# EAGLE board CT_schematic (EAGLE 7.6.0)

Size 100 x 80 mm. Coordinates in mm from the lower left corner, seen from the top.
Outline: 0,0 100,0 100,80 0,80 0,0
Copper layers (1*16): Top 0.035mm / dielectric 1.5mm / Bottom 0.035mm
Design rules "default": minimum track width 10mil, minimum drill 24mil, track to track 8mil, track to pad 8mil, pad to pad 8mil, via to via 8mil, smd to smd 8mil, copper to edge 40mil, drill to drill 8mil, minimum pad ring 10mil, minimum via ring 8mil, stop-mask expansion 4mil, vias tented up to drill 0mil, thermal gap 10mil

## Footprints (pad centres in the part's own frame; a part is rotated, then mirrored left to right if it is on the bottom)
C0603 = smd 0.8 x 0.8: 1 -0.762,0; 2 0.762,0
C0402 = smd 0.5 x 0.5: 1 -0.508,0; 2 0.508,0
C0805 = smd 1.2 x 1.3: 1 -1.016,0; 2 1.016,0
C1206 = smd 1.3 x 1.6: 1 -1.524,0; 2 1.524,0
C1210 = smd 1.2 x 2.5: 1 -1.524,0; 2 1.524,0
EXV-9H = smd 3.505 x 1.676: 1 -2.857,0; 2 2.857,0
L0603 = smd 0.8 x 0.8: 1 -0.762,0; 2 0.762,0
L1210 = smd 1.2 x 2.5: 1 -1.524,0; 2 1.524,0
PJ-037B_PACKAGE = drill 3.7 square: 1 12,0 | drill 3.2 square: 2 6,0
R0603 = smd 0.8 x 0.8: 1 -0.762,0; 2 0.762,0
LQFP64 = smd 0.3 x 1.2: 1 -3.75,-5.75; 2 -3.25,-5.75; 3 -2.75,-5.75; 4 -2.25,-5.75; 5 -1.75,-5.75; 6 -1.25,-5.75; 7 -0.75,-5.75; 8 -0.25,-5.75; 9 0.25,-5.75; 10 0.75,-5.75; 11 1.25,-5.75; 12 1.75,-5.75; 13 2.25,-5.75; 14 2.75,-5.75; 15 3.25,-5.75; 16 3.75,-5.75; 33 3.75,5.75; 34 3.25,5.75; 35 2.75,5.75; 36 2.25,5.75; 37 1.75,5.75; 38 1.25,5.75; 39 0.75,5.75; 40 0.25,5.75; 41 -0.25,5.75; 42 -0.75,5.75; 43 -1.25,5.75; 44 -1.75,5.75; 45 -2.25,5.75; 46 -2.75,5.75; 47 -3.25,5.75; 48 -3.75,5.75 | smd 1.2 x 0.3: 17 5.75,-3.75; 18 5.75,-3.25; 19 5.75,-2.75; 20 5.75,-2.25; 21 5.75,-1.75; 22 5.75,-1.25; 23 5.75,-0.75; 24 5.75,-0.25; 25 5.75,0.25; 26 5.75,0.75; 27 5.75,1.25; 28 5.75,1.75; 29 5.75,2.25; 30 5.75,2.75; 31 5.75,3.25; 32 5.75,3.75; 49 -5.75,3.75; 50 -5.75,3.25; 51 -5.75,2.75; 52 -5.75,2.25; 53 -5.75,1.75; 54 -5.75,1.25; 55 -5.75,0.75; 56 -5.75,0.25; 57 -5.75,-0.25; 58 -5.75,-0.75; 59 -5.75,-1.25; 60 -5.75,-1.75; 61 -5.75,-2.25; 62 -5.75,-2.75; 63 -5.75,-3.25; 64 -5.75,-3.75
AT24C02D = smd 1.6 x 0.6: 1 -2.475,1.905 | smd 1.55 x 0.6: 2 -2.475,0.635; 3 -2.475,-0.635; 4 -2.475,-1.905; 5 2.475,-1.905; 6 2.475,-0.635; 7 2.475,0.635; 8 2.475,1.905
SSOP-20 = smd 1.651 x 0.432: 1 -3.48,2.925; 2 -3.48,2.275; 3 -3.48,1.625; 4 -3.48,0.975; 5 -3.48,0.325; 6 -3.48,-0.325; 7 -3.48,-0.975; 8 -3.48,-1.625; 9 -3.48,-2.275; 10 -3.48,-2.925; 11 3.48,-2.925; 12 3.48,-2.275; 13 3.48,-1.625; 14 3.48,-0.975; 15 3.48,-0.325; 16 3.48,0.325; 17 3.48,0.975; 18 3.48,1.625; 19 3.48,2.275; 20 3.48,2.925
182-009-MALE = drill 1.194 pad 1.524 octagon: 1 -5.537,10.923; 2 -2.769,10.923; 3 0,10.923; 4 2.769,10.923; 5 5.537,10.923; 6 -4.153,8.08; 7 -1.384,8.08; 8 1.384,8.08; 9 4.153,8.08 | hole 3.048: -12.446,9.501; 12.446,9.501
ASEK = smd 1.4 x 1: 1 -1.1,-0.8; 2 1.1,-0.8; 3 1.1,0.8; 4 -1.1,0.8
ASFL1 = smd 1.7 x 1.5: 1 -1.27,-1.1; 2 1.27,-1.1; 3 1.27,1.1; 4 -1.27,1.1
WSON-8 = smd 0.3 x 0.6: 1 -0.75,0; 2 0.05,0; 3 0.85,0; 4 1.65,0; 5 1.65,3.8; 6 0.85,3.8; 7 0.05,3.8; 8 -0.75,3.8 | smd 3 x 2.6: PAD 0.45,1.9
SON-6 = smd 0.55 x 0.3: 1 -0.355,0.5 | smd 0.52 x 0.3: 2 -0.37,0; 3 -0.37,-0.5; 4 0.37,-0.5; 5 0.37,0; 6 0.37,0.5
SW_4-1437565-2 = smd 1.4 x 2.1: 1 -2.23,4.55; 2 -2.23,-4.55; 3 2.23,4.55; 4 2.23,-4.55
LGM67K-G1J2-24-Z = smd 0.8 x 1.4: A -2,0; C 0,0
NC7SZ125M5X = smd 1.3 x 0.7: 1 -1.3,0.95; 2 -1.3,0; 3 -1.3,-0.95; 4 1.3,-0.95; 5 1.3,0.95
DUMMY_PACKAGE_124 = drill 0.3: 1 0,-1; 2 1.5,-1; 3 3,-1

## Placement (x,y rotation side)
C1  1e-06  [C0603]  -58.42,62.23 0 top  (outside the outline)
C2  1e-07  [C0603]  -62.23,62.23 0 top  (outside the outline)
C3  1e-07  [C0603]  -66.04,62.23 0 top  (outside the outline)
C4  1e-07  [C0603]  -69.85,62.23 0 top  (outside the outline)
C5  1e-07  [C0603]  -15.24,67.31 0 top  (outside the outline)
C6  1e-07  [C0603]  -19.05,67.31 0 top  (outside the outline)
C7  4.7e-06  [C0603]  -54.61,62.23 0 top  (outside the outline)
C8  1e-08  [C0603]  -22.86,67.31 0 top  (outside the outline)
C9  1e-08  [C0603]  -26.67,67.31 0 top  (outside the outline)
C10  1e-06  [C0603]  -30.48,67.31 0 top  (outside the outline)
C11  1e-08  [C0402]  -19.05,72.39 0 top  (outside the outline)
C12  1e-06  [C0603]  -34.29,67.31 0 top  (outside the outline)
C13  1e-06  [C0603]  -38.1,67.31 0 top  (outside the outline)
C14  1e-06  [C0603]  -41.91,67.31 0 top  (outside the outline)
C15  4.7e-06  [C0805]  -40.64,55.88 0 top  (outside the outline)
C16  1e-08  [C0402]  -22.86,72.39 0 top  (outside the outline)
C17  1e-08  [C0402]  -26.67,72.39 0 top  (outside the outline)
C18  1e-08  [C0402]  -30.48,72.39 0 top  (outside the outline)
C19  1e-05  [C1206]  -29.21,55.88 0 top  (outside the outline)
C20  1e-05  [C1210]  -16.51,57.15 0 top  (outside the outline)
C21  1e-07  [C0402]  -34.29,72.39 0 top  (outside the outline)
C22  0.0001  [EXV-9H]  -38.1,49.53 0 top  (outside the outline)
C23  0.0001  [EXV-9H]  -49.53,49.53 0 top  (outside the outline)
C24  1e-08  [C0402]  -38.1,72.39 0 top  (outside the outline)
F1  240.0  [L0603]  -45.72,67.31 0 top  (outside the outline)
I1  1.5e-05  [L1210]  -22.86,57.15 0 top  (outside the outline)
J1  PJ-037B  [PJ-037B_PACKAGE]  -67.31,7.62 0 top  (outside the outline)
R2  1000.0  [R0603]  -49.53,67.31 0 top  (outside the outline)
R4  4700.0  [R0603]  -53.34,67.31 0 top  (outside the outline)
R5  2200.0  [R0603]  -57.15,67.31 0 top  (outside the outline)
R6  2200.0  [R0603]  -60.96,67.31 0 top  (outside the outline)
R7  10000.0  [R0603]  -20.32,62.23 0 top  (outside the outline)
R8  10000.0  [R0603]  -25.4,62.23 0 top  (outside the outline)
R9  10000.0  [R0603]  -30.48,62.23 0 top  (outside the outline)
R10  10000.0  [R0603]  -35.56,62.23 0 top  (outside the outline)
R11  10000.0  [R0603]  -40.64,62.23 0 top  (outside the outline)
R12  100000.0  [R0603]  -45.72,55.88 0 top  (outside the outline)
R13  100000.0  [R0603]  -50.8,55.88 0 top  (outside the outline)
R14  100000.0  [R0603]  -55.88,55.88 0 top  (outside the outline)
R15  100000.0  [R0603]  -60.96,55.88 0 top  (outside the outline)
R16  2231.0  [R0603]  -64.77,67.31 0 top  (outside the outline)
R17  1000.0  [R0603]  -68.58,67.31 0 top  (outside the outline)
R18  10000.0  [R0603]  -45.72,62.23 0 top  (outside the outline)
R19  10000.0  [R0603]  -50.8,62.23 0 top  (outside the outline)
R20  9100.0  [R0603]  -15.24,72.39 0 top  (outside the outline)
R21  680000.0  [R0603]  -66.04,55.88 0 top  (outside the outline)
R22  120000.0  [R0603]  -15.24,62.23 0 top  (outside the outline)
U1  stm32f100r8t6  [LQFP64]  -22.86,29.21 0 top  (outside the outline)
U2  AT24C02D-SSHM-T  [AT24C02D]  -60.96,27.94 0 top  (outside the outline)
U3  MAX3218EAP+T  [SSOP-20]  -17.78,40.64 0 top  (outside the outline)
U4  182-009-113R531  [182-009-MALE]  -36.83,6.35 0 top  (outside the outline)
U5  ASEK-32.768KHz-ECST  [ASEK]  -29.21,49.53 0 top  (outside the outline)
U6  ASFL1-25MHZ-NCS  [ASFL1]  -57.15,40.64 0 top  (outside the outline)
U7  LP3878SDX-ADJ/NOPB  [WSON-8]  -40.64,39.37 0 top  (outside the outline)
U8  TPS3895ADRYR  [SON-6]  -46.99,71.12 0 top  (outside the outline)
U9  4-1437565-2  [SW_4-1437565-2]  -44.45,27.94 0 top  (outside the outline)
U10  Q65110A2395  [LGM67K-G1J2-24-Z]  -59.69,49.53 0 top  (outside the outline)
U11  nc7sz125m5x  [NC7SZ125M5X]  -34.29,55.88 0 top  (outside the outline)
U12  Dummy  [DUMMY_PACKAGE_124]  -44.45,72.39 0 top  (outside the outline)

## Library data of the parts
C1-C24 F1 I1 J1 R2 R4-R22 U1-U12 = circuit_tree

## Nets
CLK_U1_3: U1.3 U5.3
CLK_U1_5: U1.5 U6.3
GND: C1.2 C2.2 C3.2 C4.2 C5.2 C6.2 C7.2 C8.2 C9.2 C10.2 C11.2 C12.2 C13.2 C14.2 C16.2 C17.2 C18.2 C19.2 C20.2 C21.2 C22.2 C23.2 C24.2 J1.2 R2.2 R7.2 R8.2 R10.2 R11.2 R17.2 R20.2 R22.2 U1.12 U1.18 U1.31 U1.47 U1.63 U2.4 U3.5 U3.17 U3.20 U4.5 U5.2 U6.2 U7.3 U7.PAD U8.2 U10.C U11.1 U11.3 U12.1
NET_U1_7: R4.1 U1.7 U11.4
NET_U1_13: C8.1 C9.1 C10.1 F1.1 U1.13
NET_U1_58: R5.1 U1.58 U2.6
NET_U1_59: R6.1 U1.59 U2.5
NET_U1_60: R7.1 U1.60
NET_U1_61: U10.A
NET_U1_62: U9.3 U9.4
NET_U2_1: R9.1 U2.1
NET_U2_2: R10.1 U2.2
NET_U2_3: R11.1 U2.3
NET_U2_7: R8.1 U2.7
NET_U3_1: I1.1 U3.1
NET_U3_2: R12.1 U3.2
NET_U3_3: R13.1 U3.3
NET_U3_4: R14.1 U3.4
NET_U3_15: C14.1 U3.15
NET_U3_16: C15.2 U3.16
NET_U3_18: C15.1 U3.18
NET_U3_19: C13.1 U3.19
NET_U4_2: U3.12 U4.2
NET_U4_3: U3.14 U4.3
NET_U4_7: U3.11 U4.7
NET_U4_8: U3.13 U4.8
NET_U7_1: C18.1 U7.1
NET_U7_6: R16.2 R17.1 U7.6
NET_U7_8: R15.1 U7.8
NET_U8_1: R19.1 R20.1 U8.1
NET_U8_3: R21.2 R22.1 U8.3
NET_U8_4: R18.1 U8.4 U11.2
NET_U9_1: R2.1 U9.1 U9.2
PROC_ADC1_IN3: U1.17 U12.3
PROC_ADC1_IN4: U1.20 U12.2
PROC_USART1_CTS: U1.44 U3.8
PROC_USART1_RTS: U1.45 U3.10
PROC_USART1_RX: U1.43 U3.9
PROC_USART1_TX: U1.42 U3.7
VCC_S1_10V1: C19.1 C22.1 C23.1 J1.1 R15.2 U7.4
VCC_TIER1_3V3: C1.1 C2.1 C3.1 C4.1 C5.1 C6.1 C7.1 C11.1 C12.1 C16.1 C17.1 C20.1 C21.1 C24.1 F1.2 I1.2 R4.2 R5.2 R6.2 R9.2 R12.2 R13.2 R14.2 R16.1 R18.2 R19.2 R21.1 U1.1 U1.19 U1.32 U1.48 U1.64 U2.8 U3.6 U5.4 U6.4 U7.5 U8.6 U11.5

## Tracks (layer width: path | path; a pad name or v marks a point on that pad's centre or on a via)
CLK_U1_3  (1 unrouted)
CLK_U1_5  (1 unrouted)
GND  (50 unrouted)
NET_U1_7  (2 unrouted)
NET_U1_13  (4 unrouted)
NET_U1_58  (2 unrouted)
NET_U1_59  (2 unrouted)
NET_U1_60  (1 unrouted)
NET_U1_62  (1 unrouted)
NET_U2_1  (1 unrouted)
NET_U2_2  (1 unrouted)
NET_U2_3  (1 unrouted)
NET_U2_7  (1 unrouted)
NET_U3_1  (1 unrouted)
NET_U3_2  (1 unrouted)
NET_U3_3  (1 unrouted)
NET_U3_4  (1 unrouted)
NET_U3_15  (1 unrouted)
NET_U3_16  (1 unrouted)
NET_U3_18  (1 unrouted)
NET_U3_19  (1 unrouted)
NET_U4_2  (1 unrouted)
NET_U4_3  (1 unrouted)
NET_U4_7  (1 unrouted)
NET_U4_8  (1 unrouted)
NET_U7_1  (1 unrouted)
NET_U7_6  (2 unrouted)
NET_U7_8  (1 unrouted)
NET_U8_1  (2 unrouted)
NET_U8_3  (2 unrouted)
NET_U8_4  (2 unrouted)
NET_U9_1  (2 unrouted)
PROC_ADC1_IN3  (1 unrouted)
PROC_ADC1_IN4  (1 unrouted)
PROC_USART1_CTS  (1 unrouted)
PROC_USART1_RTS  (1 unrouted)
PROC_USART1_RX  (1 unrouted)
PROC_USART1_TX  (1 unrouted)
VCC_S1_10V1  (5 unrouted)
VCC_TIER1_3V3  (38 unrouted)